# Altium PCB playB.PcbDoc
Units mm, origin at the board's own origin, x right, y up, seen from the top; angles counter-clockwise.
Board outline 50 x 50 mm, 2 copper layers (Top Layer, Bottom Layer); 9 components, 9 nets, 32 pads, 0 vias.
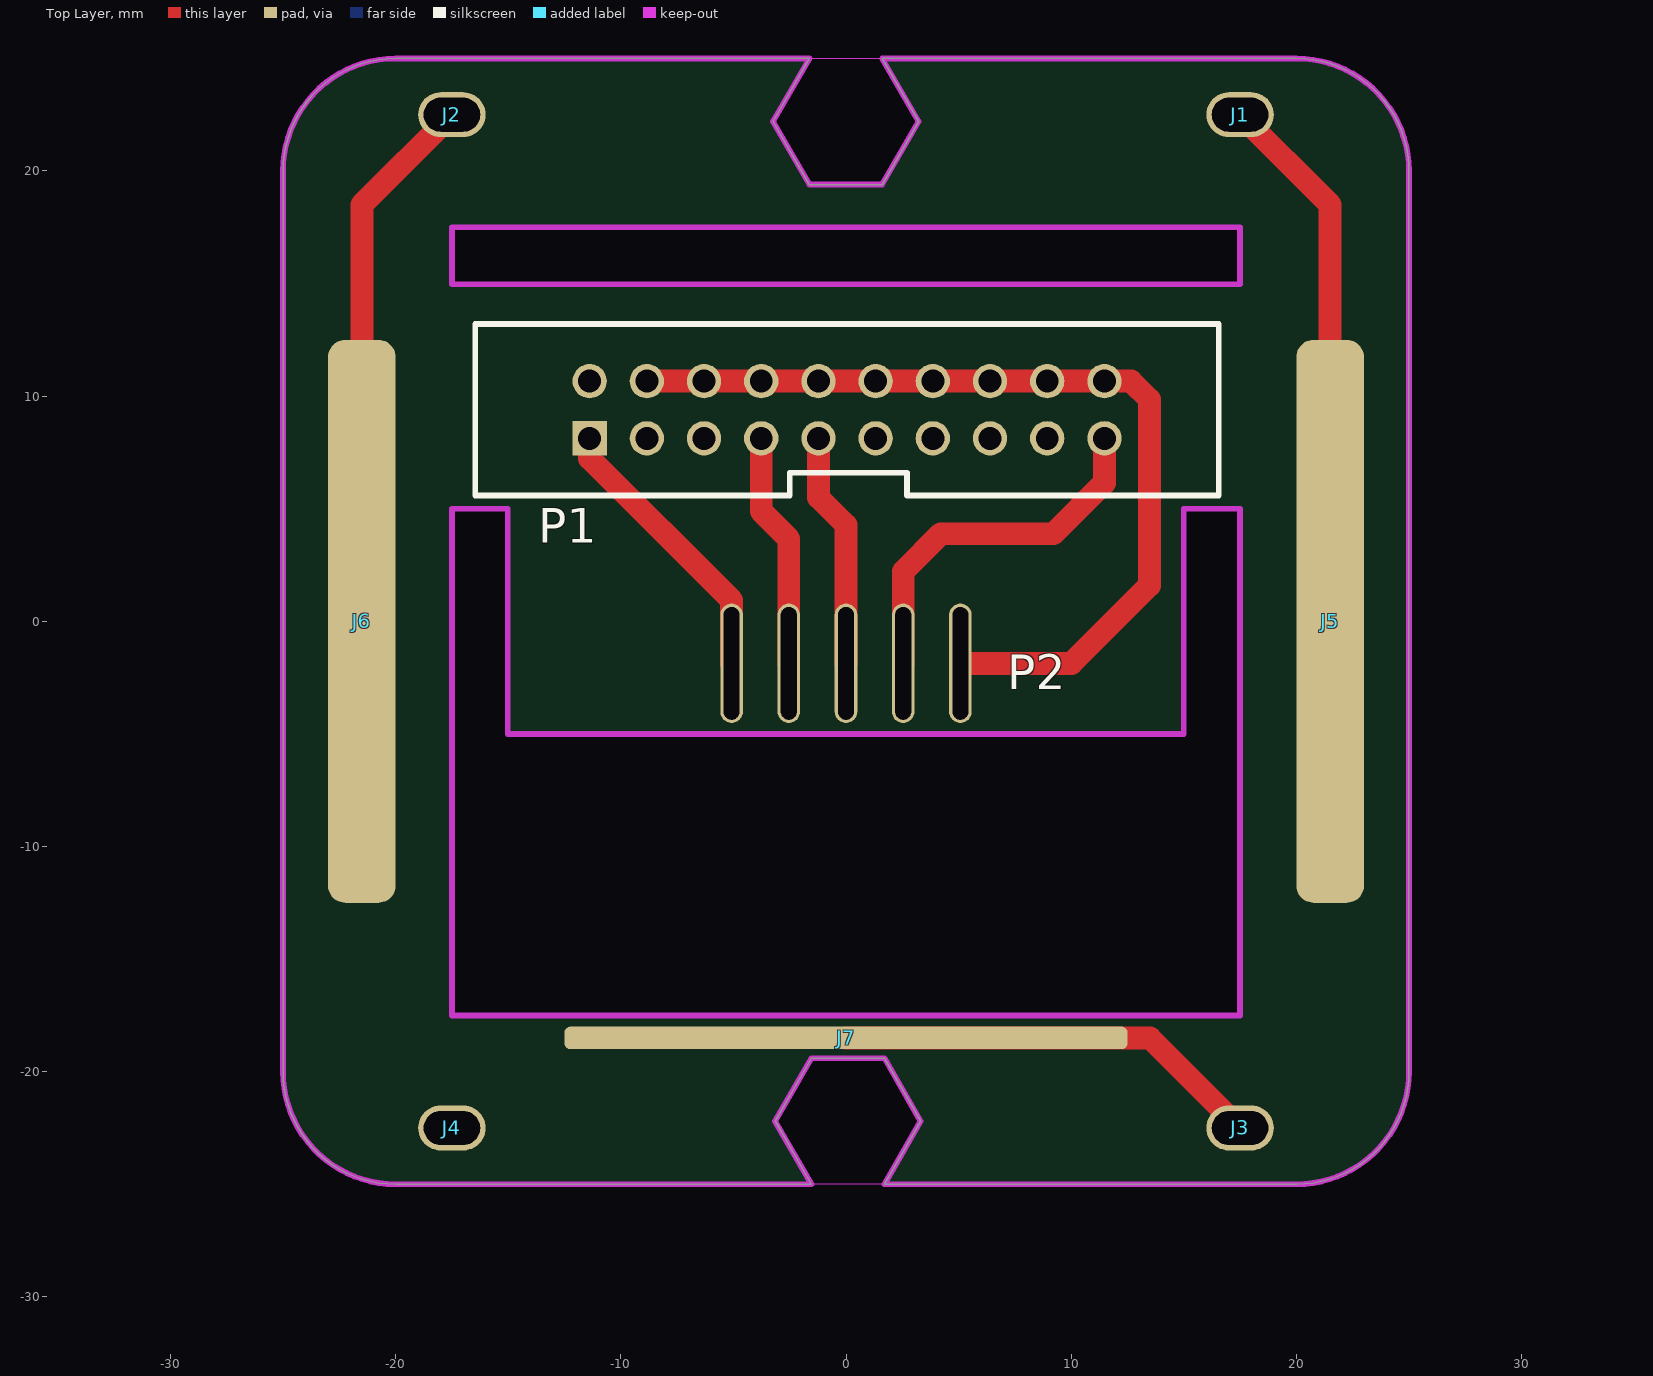
[diagram p0: Top Layer view]
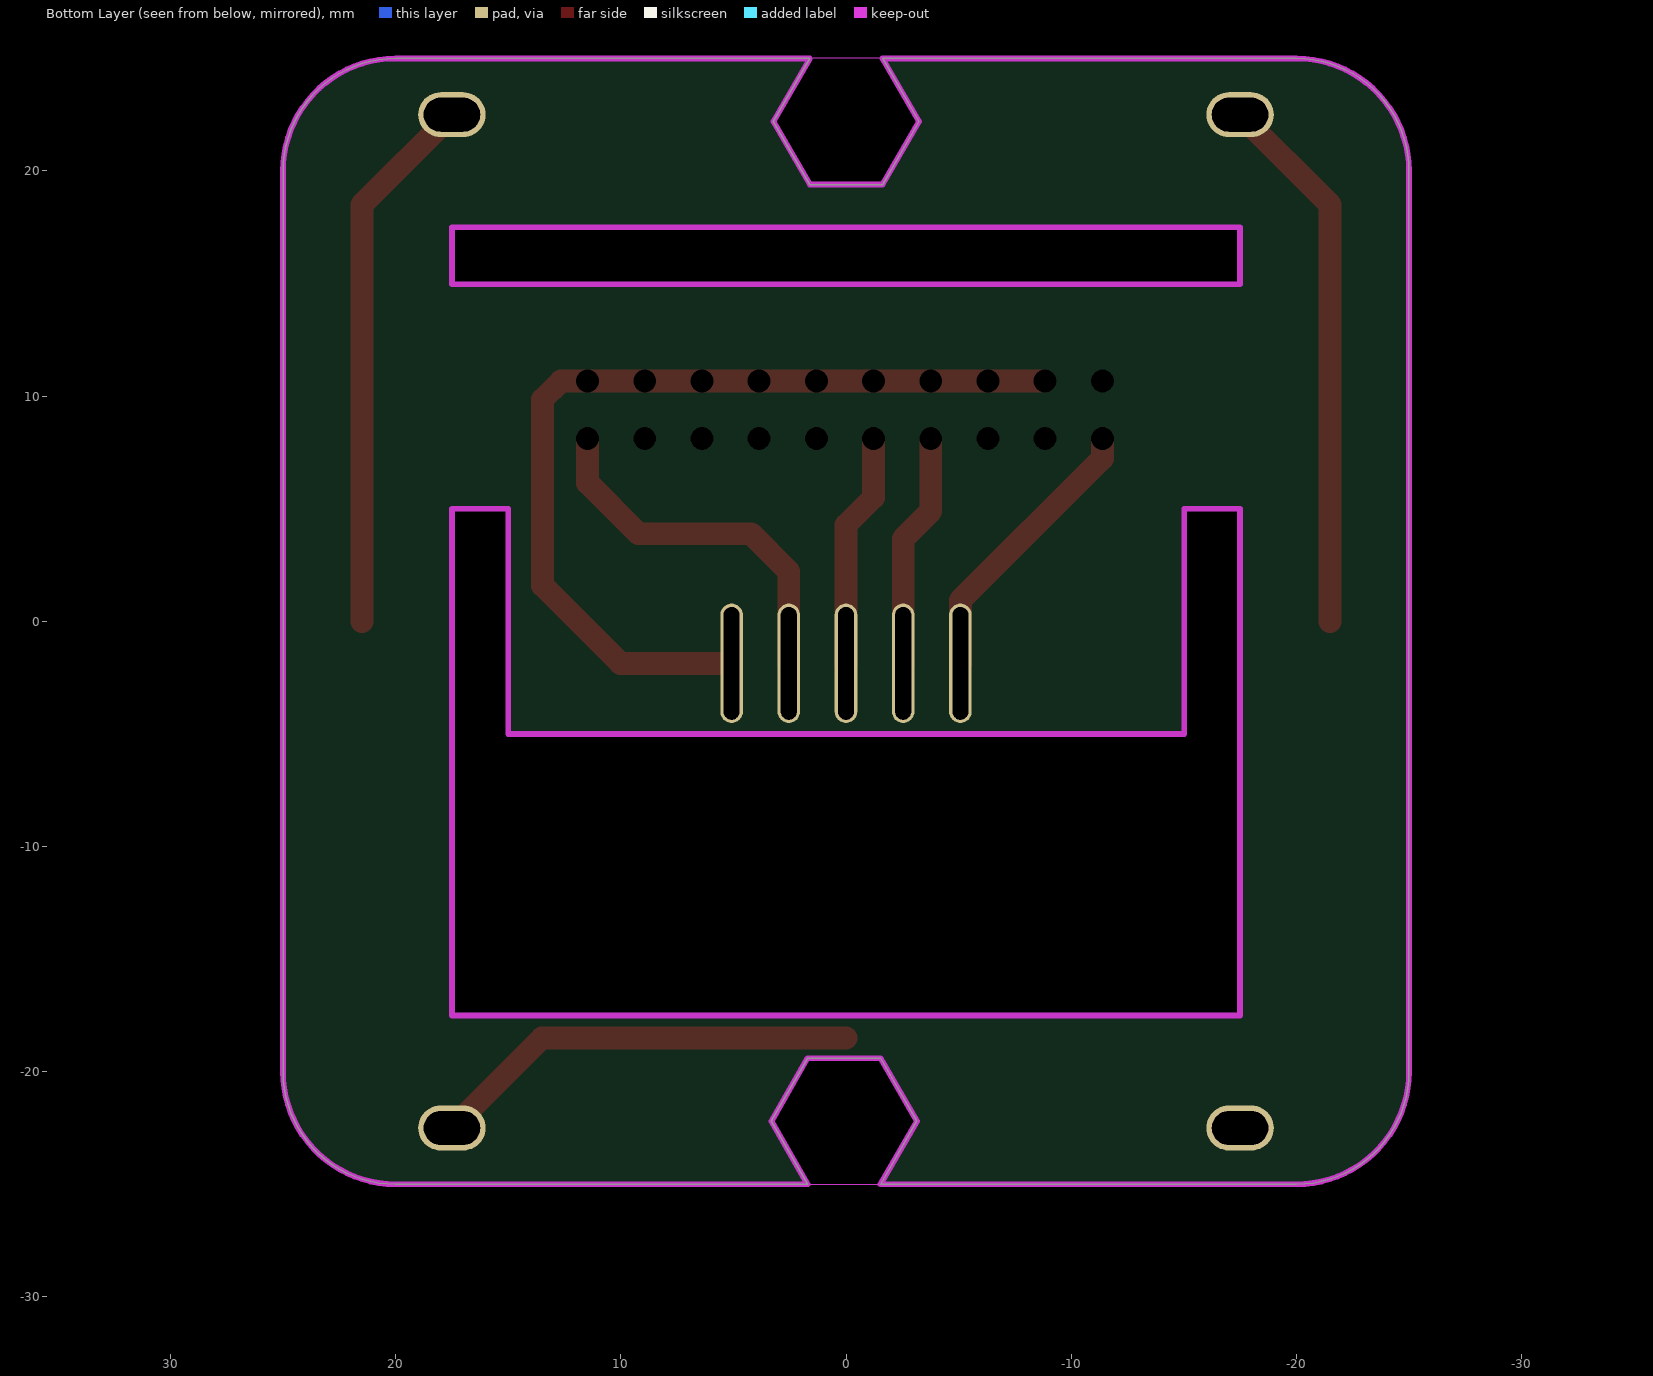
[diagram p1: Bottom Layer view, seen from below]

## Layer stack, top to bottom
Top Layer: signal copper 0.0356
Dielectric: dielectric 0.32, FR-4, Dk 4.8
Bottom Layer: signal copper 0.0356

## Board outline
-25,-20 ccw(c-20,-20) -20,-25 -1.533,-25 -3.15,-22.2 -1.533,-19.4 1.7,-19.4 3.317,-22.2 1.7,-25 20,-25 ccw(c20,-20) 25,-20 25,20 ccw(c20,20) 20,25 1.608,25 3.225,22.2 1.608,19.4 -1.625,19.4 -3.242,22.2 -1.625,25 -20,25 ccw(c-20,20) -25,20
cut-out: -17.5,-17.5 -17.5,5 -15.025,5 -15.025,-5 15,-5 15,5 17.5,5 17.5,-17.5
cut-out: -17.5,14.975 -17.5,17.5 17.5,17.5 17.5,14.975
cut-out: -1.533,-25 -3.15,-22.2 -1.533,-19.4 1.7,-19.4 3.317,-22.2 1.7,-25
cut-out: -1.625,19.4 -3.242,22.2 -1.625,25 1.608,25 3.225,22.2 1.608,19.4

## Design rules (kind name [scope] priority, off if disabled: settings)
Clearance [All] p1: gap=0.254
PolygonConnect [All] p1: connectstyle=Relief reliefconductorwidth=0.254 reliefentries=4 polygonreliefangle="90 Angle"
RoutingVias [All] p1: holewidth=0.711 width=1.27 viastyle="Through Hole" minholewidth=0.711 minwidth=1.27 maxholewidth=0.711 maxwidth=1.27
SilkscreenOverComponentPads [All] p1: minsilkscreentomaskgap=0.254
SolderMaskExpansion [All] p1: expansion=0.102
TestPointUsage [All] p1: valid=0 allowmultiple=FALSE
Testpoint [All] p1: side=15 testpointundercomponent=TRUE minsize=1.016 maxsize=2.54 preferedsize=1.524 minholesize=0 maxholesize=1.016 preferedholesize=0.813 testpointgrid=0.025 style=1023 order=0123456789
Width [All] p1: maxlimit=1.27 minlimit=0.254 preferedwidth=0.254
23 further rules are at their usual default settings.

## Components (designator, comment, footprint, x,y, rotation, side; value= is the part's Value field where it differs from the comment)
J1 "PAD" LINK_HOLE#1 17.272,22.352 r0 top
J2 "PAD" LINK_HOLE#2 -17.5,22.5 r0 top
J3 "PAD" LINK_HOLE#3 19.812,-22.352 r0 top
J4 "PAD" LINK_HOLE#4 -17.272,-22.352 r0 top
J5 "PAD" Button_Pad#1 20.32,0 r90 top
J6 "PAD" Button_Pad#2 -21.336,0 r90 top
J7 "PAD" Button_Pad#3 0,-18.5 r0 top
P1 "Jlink-20" J-LINK -11.384,8.128 r90 top
P2 "Header 5H" connect_5pin 0,-4.064 r270 top

## Footprints (in the part's own frame and the unit in brackets; to place one, negate y for a bottom-side part, rotate by r counter-clockwise, add the part's x,y. Pads: shape width x height; smd on the part's side, far side on the other; paste and mask are expansions set on the pad)
Button_Pad#1 [mm]
  rrect50% 25x3 smd: 1(0,-1.18)
Button_Pad#2 [mm]
  rrect50% 25x3 smd: 1(0,0.164)
Button_Pad#3 [mm]
  rrect50% 25x1 smd: 1(0,0)
connect_5pin [mm]
  oval 5.3x1 hole 0.7 slot 5 at 0 deg: 1(-2.2,5.08) 2(-2.2,2.54) 3(-2.2,0) 4(-2.2,-2.54) 5(-2.2,-5.08)
J-LINK [mil]
  rect 60x60 / inner round 0 / far side round 0 hole 40 mask+4: 1(0,0)
  round 60 / inner round 0 / far side round 0 hole 40 mask+4: 2(100,0) 3(0,-100) 4(100,-100) 5(0,-200) 6(100,-200) 7(0,-300) 8(100,-300) 9(0,-400) 10(100,-400) 11(0,-500) 12(100,-500) 13(0,-600) 14(100,-600) 15(0,-700) 16(100,-700) 17(0,-800) 18(100,-800) 19(0,-900) 20(100,-900)
  silkscreen extent -100,-1100 200,200
LINK_HOLE#1 [mm]
  oval 3x2 hole 1.5 slot 2.5 at 0 deg: 1(0.228,0.148)
LINK_HOLE#2 [mm]
  oval 3x2 hole 1.5 slot 2.5 at 0 deg: 1(0,0)
LINK_HOLE#3 [mm]
  oval 3x2 hole 1.5 slot 2.5 at 0 deg: 1(-2.312,-0.148)
LINK_HOLE#4 [mm]
  oval 3x2 hole 1.5 slot 2.5 at 0 deg: 1(-0.228,-0.148)

## Part data
J1 J2 J3 J4 J5 J6 J7: library part Socket, "Socket"
P1: library part "Header 10X2", "Header, 10-Pin, Dual row"
P2: "Header, 5-Pin, Right Angle"

## Nets (pads, with @x,y where several pads share a name; then routed paths per layer and width w, separated by ;. In a path a pad name is that pad's centre, name@x,y a point inside that pad or via, vN(x,y) a via of type N, cw(c..) or ccw(c..) an arc to the next point about the centre after c; other vN are vias at no path point)
3V3_J: P1.1 P2.5 | length 12.6
  Top Layer w1.016: P1.1 -11.384,7.234 -5.08,0.93 P2.5
5V_J: P1.19 P2.2 | length 16.6
  Top Layer w1.016: P2.2 2.54,2.215 4.215,3.89 9.215,3.89 11.476,6.151 P1.19
BUTTON_DOWN: J3.1 J7.1 | length 19.2
  Top Layer w1.016: J7.1 13.5,-18.5 J3.1
BUTTON_LEFT: J1.1 J5.1 | length 24.2
  Top Layer w1.016: J1.1 21.5,18.5 J5.1
BUTTON_RIGHT: J2.1 J6.1 | length 24.2
  Top Layer w1.016: J6.1 -21.5,18.5 J2.1
GND: J4.1
GND_J: P1.4 P1.6 P1.8 P1.10 P1.12 P1.14 P1.16 P1.18 P1.20 P2.1 | length 40.7
  Top Layer w1.016: P1.4 P1.6 P1.8 P1.10 P1.12 P1.14 P1.16 P1.18 P1.20 12.657,10.668 13.475,9.85 13.475,1.6 10.011,-1.864 P2.1
SWCLK: P1.9 P2.3 | length 10.5
  Top Layer w1.016: P1.9 -1.224,5.499 0,4.275 P2.3
SWDIO: P1.7 P2.4 | length 10.5
  Top Layer w1.016: P1.7 -3.764,4.889 -2.54,3.665 P2.4
pads on no net: P1.2 P1.3 P1.5 P1.11 P1.13 P1.15 P1.17

## Keep-outs
Keep-Out Layer:
  lines w0.254: -25,-20 ccw(c-20,-20) -20,-25 -1.533,-25 -3.15,-22.2 -1.533,-19.4 1.7,-19.4 3.317,-22.2 1.7,-25 20,-25 ccw(c20,-20) 25,-20 25,20 ccw(c20,20) 20,25 1.608,25 3.225,22.2 1.608,19.4 -1.625,19.4 -3.242,22.2 -1.625,25 -20,25 ccw(c-20,20) -25,20 -25,-20 ; -17.5,-17.5 -17.5,5 -15.025,5 -15.025,-5 15,-5 15,5 17.5,5 17.5,-17.5 -17.5,-17.5 ; -17.5,14.975 -17.5,17.5 17.5,17.5 17.5,14.975 15,14.975 -15,14.975 -17.5,14.975